# EAGLE board Wall POWAH Rev 1.1 (EAGLE 6.5.0)
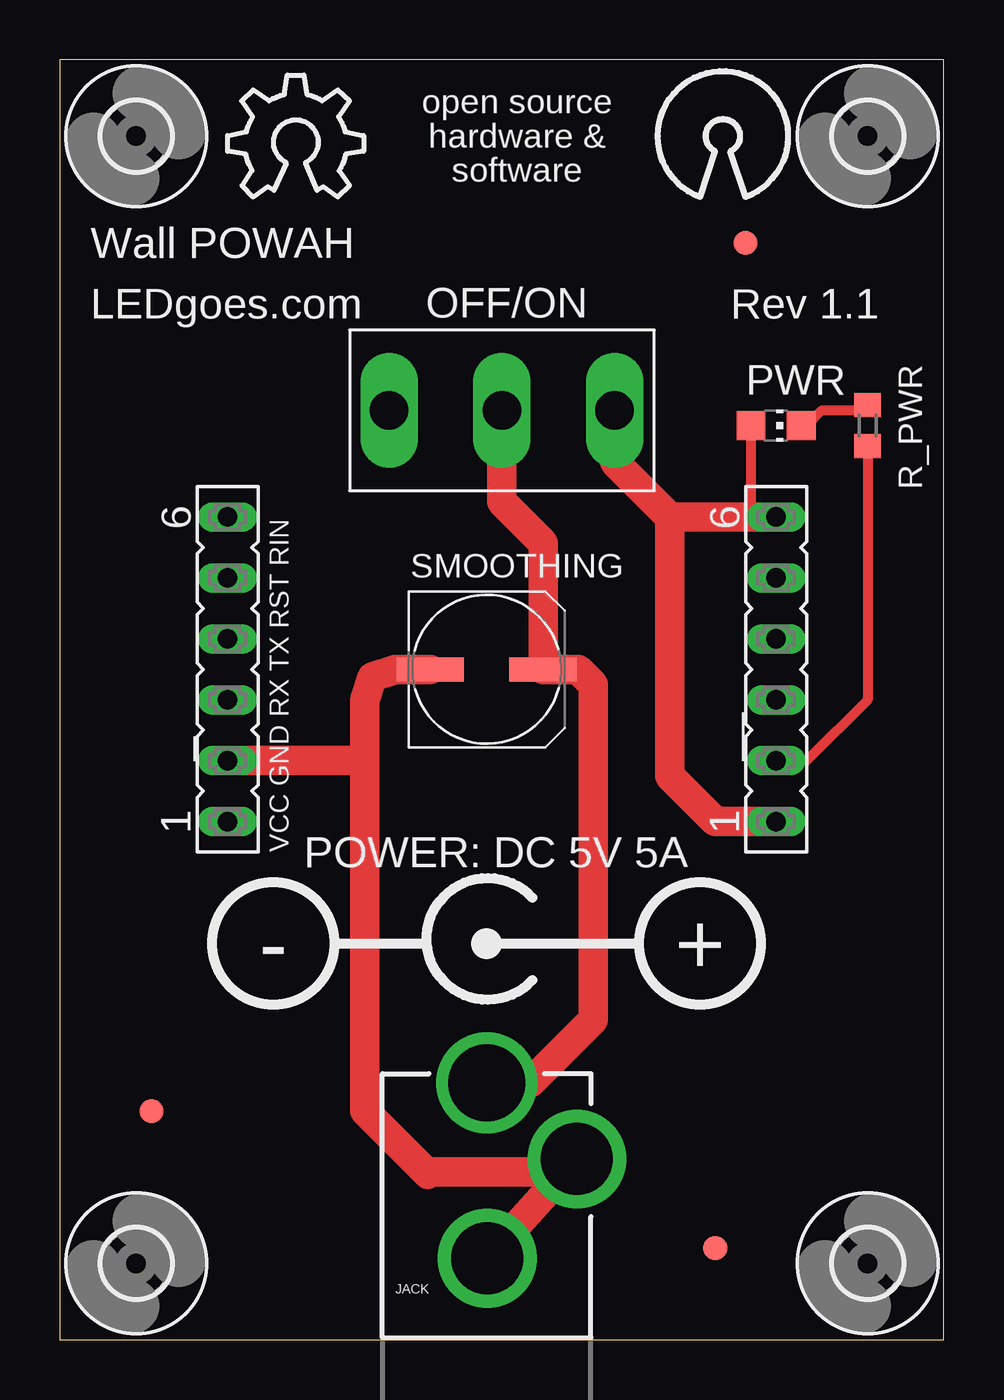
[diagram p0: board, top side]
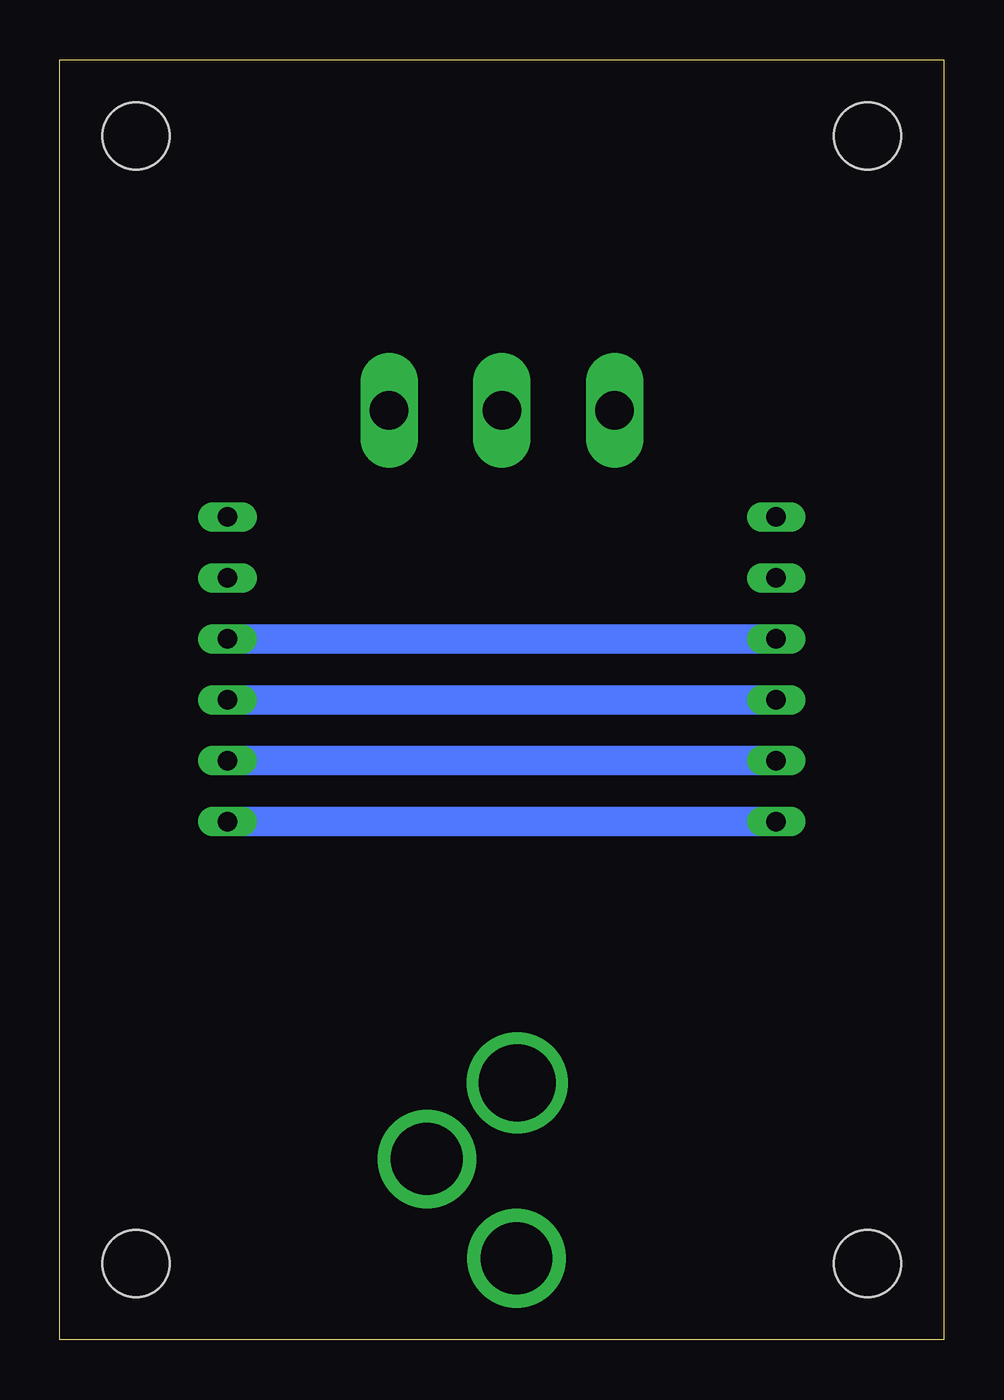
[diagram p1: board, bottom side, seen from below]

Size 36.83 x 53.34 mm. Coordinates in mm from the lower left corner, seen from the top.
Outline: 0,53.34 0,0 36.83,0 36.83,53.34 0,53.34
Copper layers (1*16): Top 0.0356mm / dielectric 1.5011mm / Bottom 0.0356mm
Design rules "LaenPCBOrder *": minimum track width 6mil, minimum drill 13mil, track to track 6mil, track to pad 6mil, pad to pad 6mil, via to via 6mil, smd to smd 6mil, copper to edge 15mil, drill to drill 6mil, minimum pad ring 7mil, minimum via ring 7mil, stop-mask expansion 4mil, vias tented up to drill 0mil, thermal gap 10mil

## Footprints (pad centres in the part's own frame; a part is rotated, then mirrored left to right if it is on the bottom)
FE06 = drill 0.813 long: 1 -6.35,0; 2 -3.81,0; 3 -1.27,0; 4 1.27,0; 5 3.81,0; 6 6.35,0
2,8 = hole 2.8: 0,0
FIDUCIAL_1MM = smd 1 x 1: 1 0,0
POWER_JACK_PTH_LOCK = drill 2.997 pad 4.115: GND 0.025,6.557; GNDBREAK 3.762,10.7 | drill 3.2 pad 4.115: PWR 0,13.878
SPDT-5A = drill 1.6 long: IN1 -4.7,0; IN2 4.7,0; OUT 0,0
CHIP-LED0805 = smd 1.2 x 1.2: A 0,-1.05; C 0,1.05
R0603 = smd 1 x 1.1: 1 -0.85,0; 2 0.85,0
UD-6,3X7,7_NICHICON = smd 2.8 x 1: + 2.35,0; - -2.35,0

## Placement (x,y rotation side)
_  [FE06]  6.99,27.94 90 top
__  [FE06]  29.84,27.94 90 top
E$1  [OSHW_8X200_NOTEXT]  6.99,47.62 0 top
E$2  [2,8]  33.66,50.16 0 top
E$3  [2,8]  3.18,50.16 0 top
E$4  [2,8]  3.18,3.17 0 top
E$5  [2,8]  33.66,3.17 0 top
E$7  [FIDUCIAL_1MM]  28.57,45.72 0 top
E$8  [FIDUCIAL_1MM]  27.3,3.81 0 top
E$9  [FIDUCIAL_1MM]  3.81,9.53 0 top
JACK  [POWER_JACK_PTH_LOCK]  17.78,-3.17 0 top
OFF/ON  [SPDT-5A]  18.41,38.73 0 top
PWR  [CHIP-LED0805]  29.84,38.1 270 top
R_PWR  [R0603]  33.66,38.1 90 top
SMOOTHING  100uF  [UD-6,3X7,7_NICHICON]  17.78,27.94 0 top

## Library data of the parts
_ __ = con-lsta
E$1 = ohw-logo
E$2-E$5 = holes
E$7-E$9 = adafruit
JACK = SparkFun-Connectors
OFF/ON = LEDgoes
PWR = led
R_PWR = eagle-ltspice
SMOOTHING = rcl

## Nets
GND: _.2 __.2 JACK.GND JACK.GNDBREAK R_PWR.1 SMOOTHING.-
S$1: JACK.PWR OFF/ON.OUT SMOOTHING.+
S$2: _.3 __.3
S$3: _.4 __.4
S$5: PWR.C R_PWR.2
VCC: _.1 __.1 __.6 OFF/ON.IN2 PWR.A

## Tracks (layer width: path | path; a pad name or v marks a point on that pad's centre or on a via)
GND
  Top 0.406: R_PWR.1 33.66,26.67 31.12,24.13 __.2
  Top 1.219: 15.33,6.89 15.24,6.99 | 15.24,6.99 12.7,9.53 12.7,24.13 | _.2 12.7,24.13 | 12.7,24.13 12.7,26.67 13.02,27.62 13.97,27.94 SMOOTHING.- | JACK.GND JACK.GNDBREAK 21.49,7.53 20.95,6.99 15.24,6.99
  Bottom 1.219: _.2 __.2
S$1
  Top 1.219: JACK.PWR 19.59,10.7 22.23,13.34 22.23,27.3 21.59,27.94 SMOOTHING.+ 20.13,33.21 18.41,34.92 OFF/ON.OUT
S$2
  Bottom 1.219: _.3 __.3
S$3
  Bottom 1.219: __.4 _.4
S$5
  Top 0.406: PWR.C 31.12,38.1 31.75,38.73 33.44,38.73 R_PWR.2
VCC
  Top 0.406: PWR.A 28.8,34.7 29.21,34.29
  Top 1.219: OFF/ON.IN2 23.12,36.57 25.4,34.29 | 25.4,34.29 29.21,34.29 __.6 | __.1 27.3,21.59 25.4,23.49 25.4,34.29
  Bottom 1.219: __.1 _.1

## Text on the board
tNames: open source / hardware & / software | Wall POWAH | LEDgoes.com | Rev 1.1 | VCC GND RX TX RST RIN | POWER: DC 5V 5A | - | +